# Altium PCB PCB_dHandlebar_Lateral.PcbDoc
Units mm, origin at the board's own origin, x right, y up, seen from the top; angles counter-clockwise.
Board outline 31.75 x 23.64 mm, 2 copper layers (Top Layer, Bottom Layer), stack 1.57 mm thick; 14 components, 10 nets, 23 pads, 0 vias.
Unrouted connection lines stored in the file: 11.
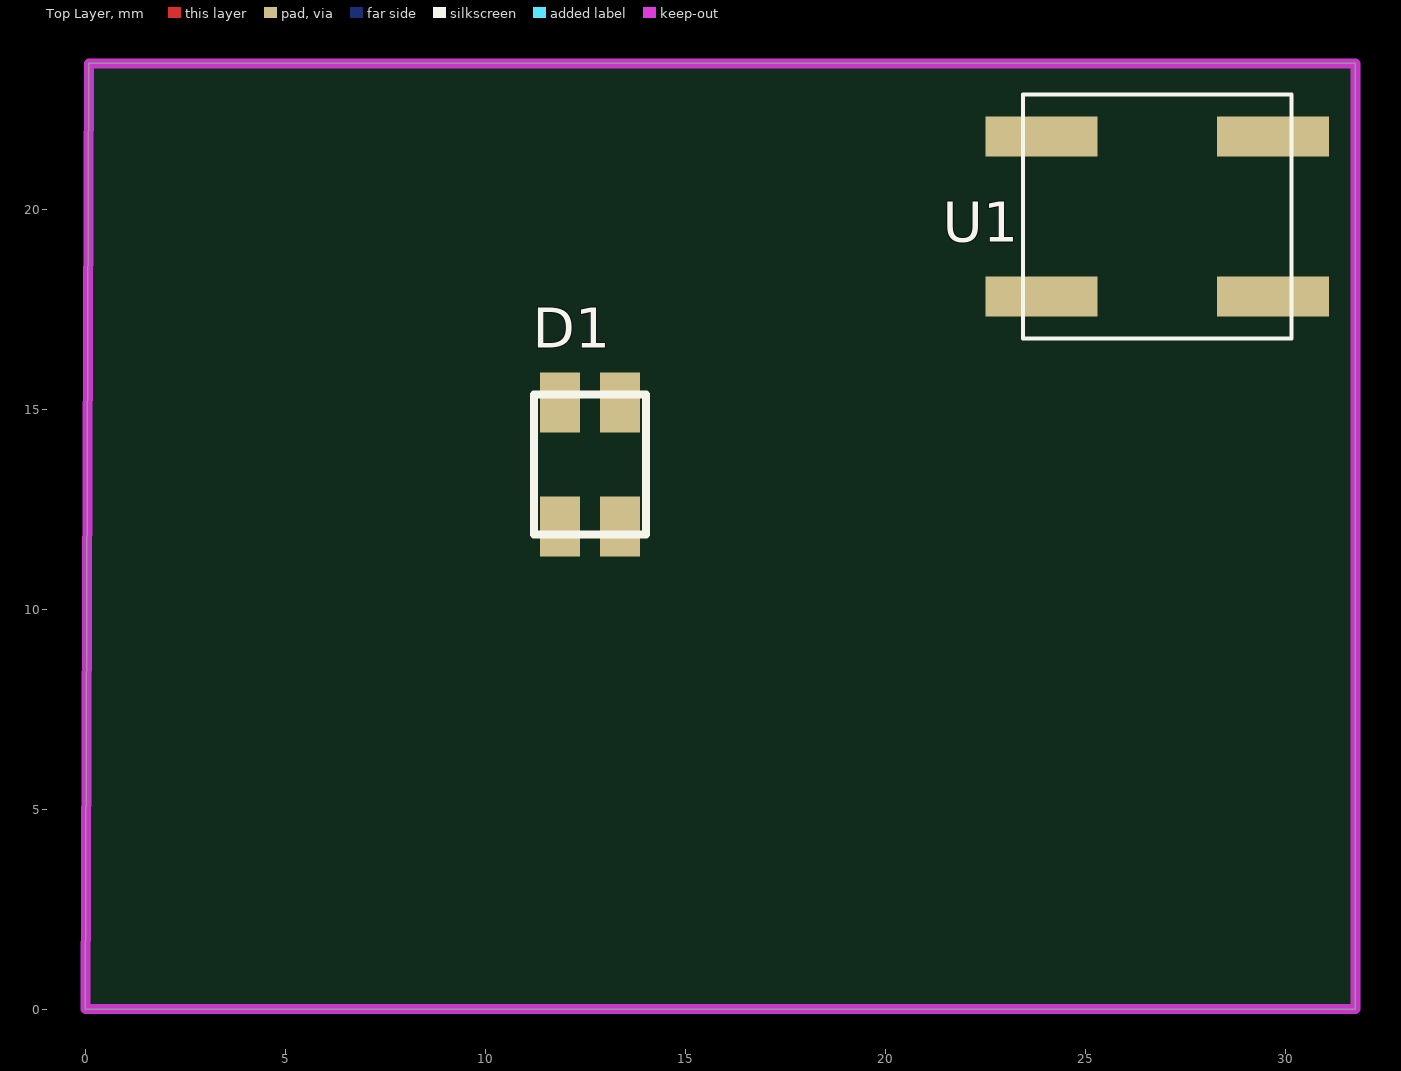
[diagram p0: Top Layer view]
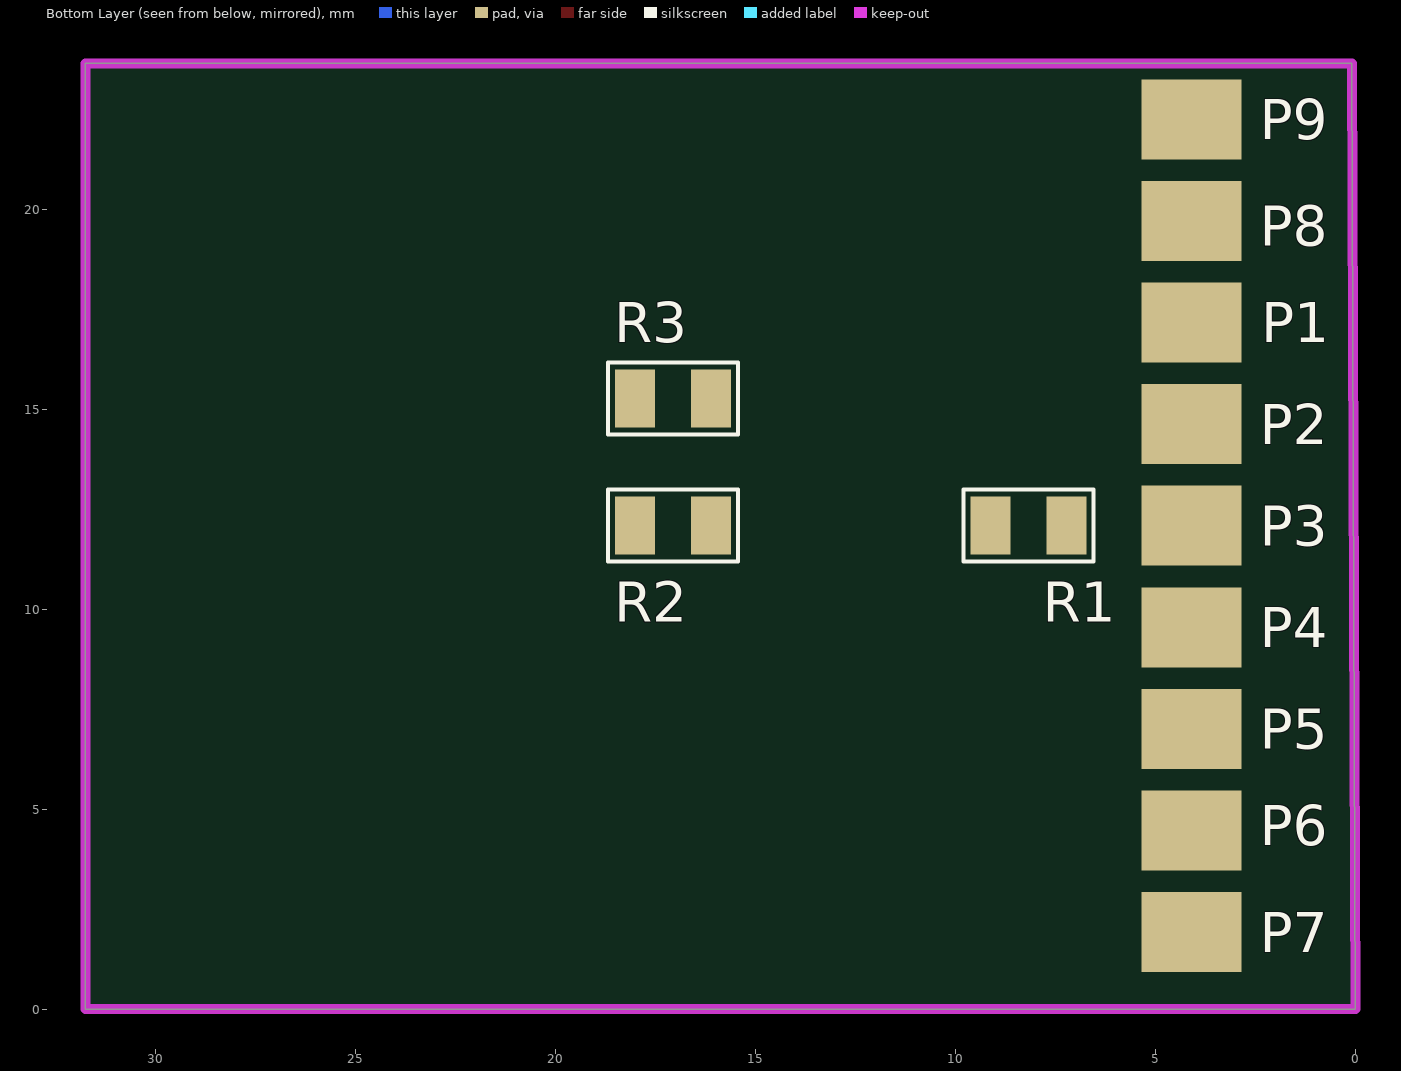
[diagram p1: Bottom Layer view, seen from below]

## Layer stack, top to bottom
Top Solder: solder mask 0.01, Solder Resist, Dk 3.5
Top Layer: signal copper 0.035
Dielectric 1: dielectric 1.5, FR-4, Dk 4.2
Bottom Layer: signal copper 0.035
Bottom Solder: solder mask 0.01, Solder Resist, Dk 3.5

## Board outline
0,0 0.087,23.641 31.75,23.641 31.75,0

## Design rules (kind name [scope] priority, off if disabled: settings)
Clearance [All] p1: gap=0.254 ignorepadtopadclearanceinfootprint=FALSE except(0: Arc-Hole Track-Hole SMDPad-Hole THPad-Hole Via-Hole Fill-Hole Poly-Hole Region-Hole Text-Hole)
PolygonConnect [All] p1: connectstyle=Relief reliefconductorwidth=0.254 reliefentries=4 polygonreliefangle="90 Angle" airgapwidth=0.254
RoutingVias [All] p1: holewidth=0.711 width=1.27 viastyle="Through Hole" minholewidth=0.711 minwidth=1.27 maxholewidth=0.711 maxwidth=1.27
SolderMaskExpansion [All] p1: expansion=0.102 istentingtop=FALSE
Width [All] p1: maxlimit=0.254 minlimit=0.254 preferedwidth=0.254
30 further rules are at their usual default settings.

## Components (designator, comment, footprint, x,y, rotation, side; value= is the part's Value field where it differs from the comment)
D1 "LED RGB" "LED RGB SMD - 150141M173100" 12.612,13.608 r90 top
P1 "JUMPER x2" "Connector - 1 Pad 1x2mm" 4.103,17.164 r180 bottom value="HDR-2.54 Male 1x2"
P2 "JUMPER x2" "Connector - 1 Pad 1x2mm" 4.103,14.624 r180 bottom value="HDR-2.54 Male 1x2"
P3 "JUMPER x2" "Connector - 1 Pad 1x2mm" 4.103,12.084 r180 bottom value="HDR-2.54 Male 1x2"
P4 "JUMPER x2" "Connector - 1 Pad 1x2mm" 4.103,9.544 r180 bottom value="HDR-2.54 Male 1x2"
P5 "JUMPER x2" "Connector - 1 Pad 1x2mm" 4.103,7.004 r180 bottom value="HDR-2.54 Male 1x2"
P6 "JUMPER x2" "Connector - 1 Pad 1x2mm" 4.103,4.464 r180 bottom value="HDR-2.54 Male 1x2"
P7 "JUMPER x2" "Connector - 1 Pad 1x2mm" 4.103,1.924 r180 bottom value="HDR-2.54 Male 1x2"
P8 "JUMPER x2" "Connector - 1 Pad 1x2mm" 4.103,19.704 r180 bottom value="HDR-2.54 Male 1x2"
P9 "JUMPER x2" "Connector - 1 Pad 1x2mm" 4.103,22.244 r180 bottom value="HDR-2.54 Male 1x2"
R1 "Res 0805" "RES 0805" 8.167,12.084 r180 bottom value="180 Ohm"
R2 "Res 0805" "RES 0805" 17.057,12.084 r0 bottom value="180 Ohm"
R3 "Res 0805" "RES 0805" 17.057,15.259 r0 bottom value="180 Ohm"
U1 "Hall" "BUTTON - KSC621JLFS" 26.797,19.812 r0 top

## Footprints (in the part's own frame and the unit in brackets; to place one, negate y for a bottom-side part, rotate by r counter-clockwise, add the part's x,y. Pads: shape width x height; smd on the part's side, far side on the other; paste and mask are expansions set on the pad)
"BUTTON - KSC621JLFS" [mm]
  rect 2.8x1 smd: 1(-2.9,2) 1(2.9,2) 2(-2.9,-2) 2(2.9,-2)
  silkscreen extent -3.35,-3.05 3.35,3.05, body extent -3.4,-3.15 3.4,3.15, height 7.65
"Connector - 1 Pad 1x2mm" [mm]
  rect 2.5x2 smd: 1(0,0)
"LED RGB SMD - 150141M173100" [mm] "LED RGB de WURTH ELEKTRONIK"
  rect 1.5x1 smd: 1(1.55,0.75) 2(1.55,-0.75) 3(-1.55,-0.75) 4(-1.55,0.75)
  silkscreen extent -1.75,-1.4 1.75,1.4, body extent -1.72,-1.37 1.78,1.43, height 1.9
"RES 0805" [mm]
  rect 1x1.45 smd: 1(-0.95,0) 2(0.95,0)
  silkscreen extent -1.63,-0.9 1.63,0.9, body extent -1,-0.63 1,0.62, height 0.68

## Part data
D1: library part 150141M173100, "LED, Superior, Transparente, RGB, Rojo, Verde, Azul, SMD, 120°, Redondo, R 30mA, V 30mA, B 30mA", Supplier Part Number 1=2322115, LatestRevisionDate=17-Jul-2002, LatestRevisionNote="Re-released for DXP Platform.", Publisher="Altium Limited", Supplier 1=Farnell
P1 P2 P3 P4 P5 P6 P7 P8 P9: library part "CONNECTOR PAD", "Conector Pad", Supplier Part Number 1=S1011E-02-ND, Category=Connector, ComponentLink1Description="SVN Datasheet", ComponentLink1URL=https://chn-vm-apps.microchip.com/mchprepo/parts/Datasheets/77311.pdf, ComponentLink2Description="Local Datasheet", ComponentLink2URL=C:\ALTIUM_WORK\00001_MCHP-CDB\Datasheets\77311.pdf, ComponentLink3Description="Open Symbol", ComponentLink3URL="C:\ALTIUM_WORK\00001_MCHP-CDB\Library\LibraryRefs\Header 1x2.SchLib", ComponentLink4Description="Open Footprint", ComponentLink4URL=C:\ALTIUM_WORK\00001_MCHP-CDB\Library\Footprints\HDR_M_2.54_1x2.PcbLib, ComponentLink5Description="Open Footprint 2", ComponentLink6Description="Open Footprint 3", ComponentLink7Description="Open Footprint 4", Description_="CON HDR-2.54 Male 1x2 Gold 5.84MH TH VERT", Dev Tools Status=Production, MCHP-ID=CON1108, Owner="Bogdan P (M91398)", Populated=Yes, Quantity Override=1, Revision=1, Status="MCL Design", Supplier 1=Digi-Key, Symbol="Header 1x2", Type="Header 2.54mm"
R1 R2 R3: library part "R 0805", "Resistencia SMD de Tipo Chip, Película Gruesa, 180 ohm, ± 1%, 500 mW, 0805 [Métrica 2012]", Supplier Part Number 1=1750745, LatestRevisionDate=17-Jul-2002, LatestRevisionNote="Re-released for DXP Platform.", PackageDescription="Axial Device, Thru-Hole; 2 Leads; 0.3 in Pin Spacing", PackageReference=AXIAL-0.3, Published=8-Jun-2000, Publisher="Altium Limited", Supplier 1=Farnell
U1: library part KSC621JLFS, "Interruptor Táctil, KSC Series, Accionamiento Superior, Montaje Superficial, Botón Redondo", Supplier Part Number 1=611-KSC621JLFS, ComponentLink5Description="Open Footprint 2", ComponentLink6Description="Open Footprint 3", ComponentLink7Description="Open Footprint 4", Revision=1, Supplier 1=Mouser

## Nets (pads, with @x,y where several pads share a name; then routed paths per layer and width w, separated by ;. In a path a pad name is that pad's centre, name@x,y a point inside that pad or via, vN(x,y) a via of type N, cw(c..) or ccw(c..) an arc to the next point about the centre after c; other vN are vias at no path point)
+5: D1.1 P1.1 P8.1 U1.1
GND: P7.1
NetD1_2: D1.2 R3.1
NetD1_3: D1.3 R2.1
NetD1_4: D1.4 R1.1
NetP2_1: P2.1 R2.2
NetP3_1: P3.1 R1.2
NetP4_1: P4.1 R3.2
NetP5_1: P5.1 U1.2
NetP6_1: P6.1 P9.1

## Keep-outs
Keep-Out Layer:
  the board outline again, w0.254

## Dimensions
0,0 to 31.75,0 on Mechanical 13
0.087,23.641 to 0,0 on Mechanical 13